# Altium PCB model_satellite.PcbDoc
Units mm, origin at the board's own origin, x right, y up, seen from the top; angles counter-clockwise.
Board outline 45 x 44 mm, 2 copper layers (Top Layer, Bottom Layer); 38 components, 25 nets, 182 pads, 51 vias.
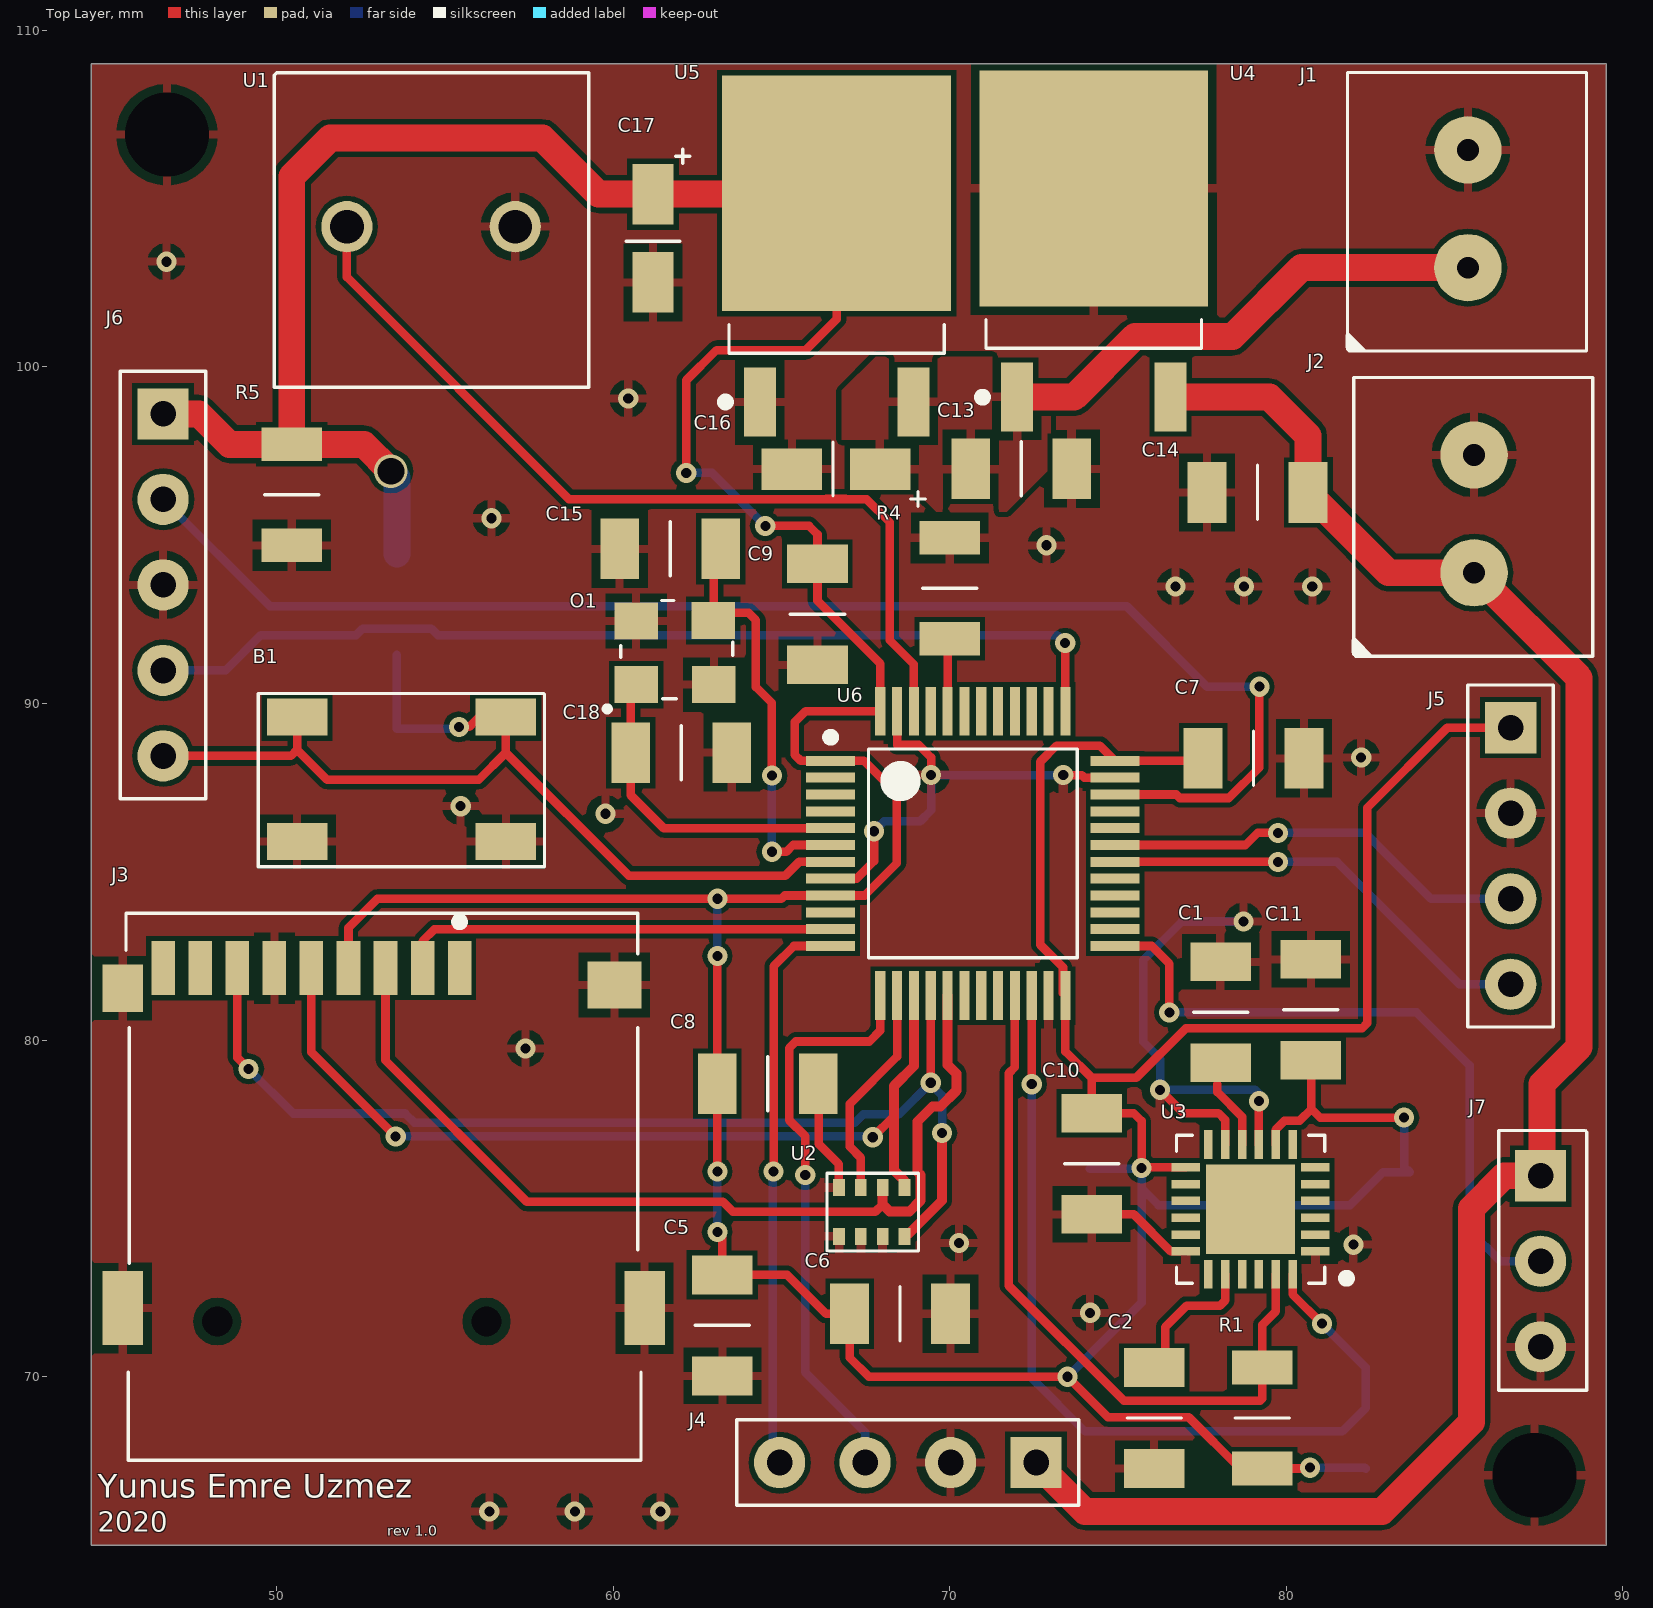
[diagram p0: Top Layer view]
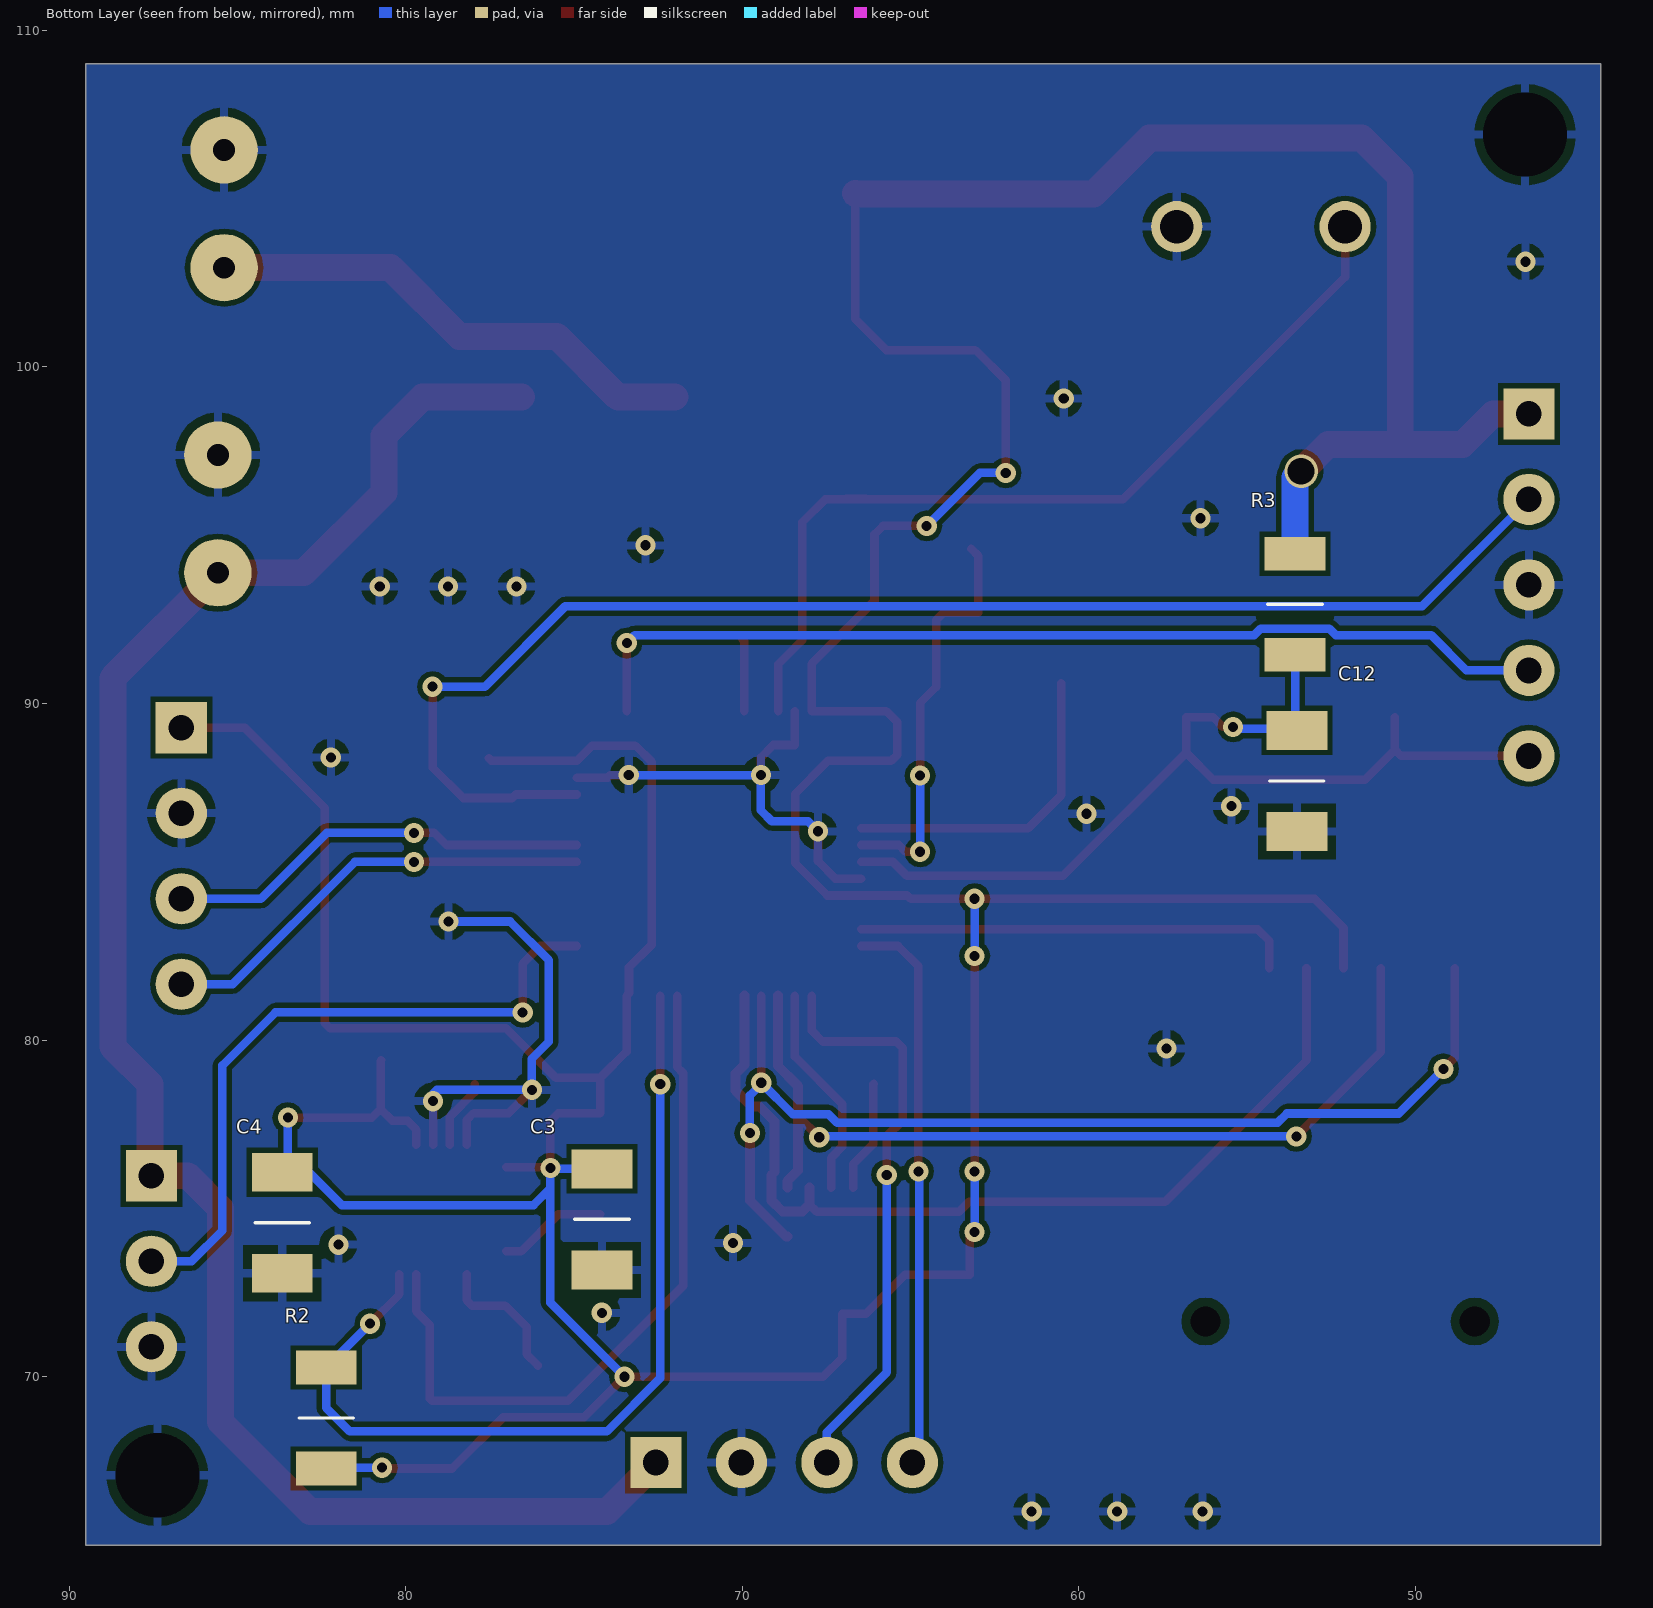
[diagram p1: Bottom Layer view, seen from below]
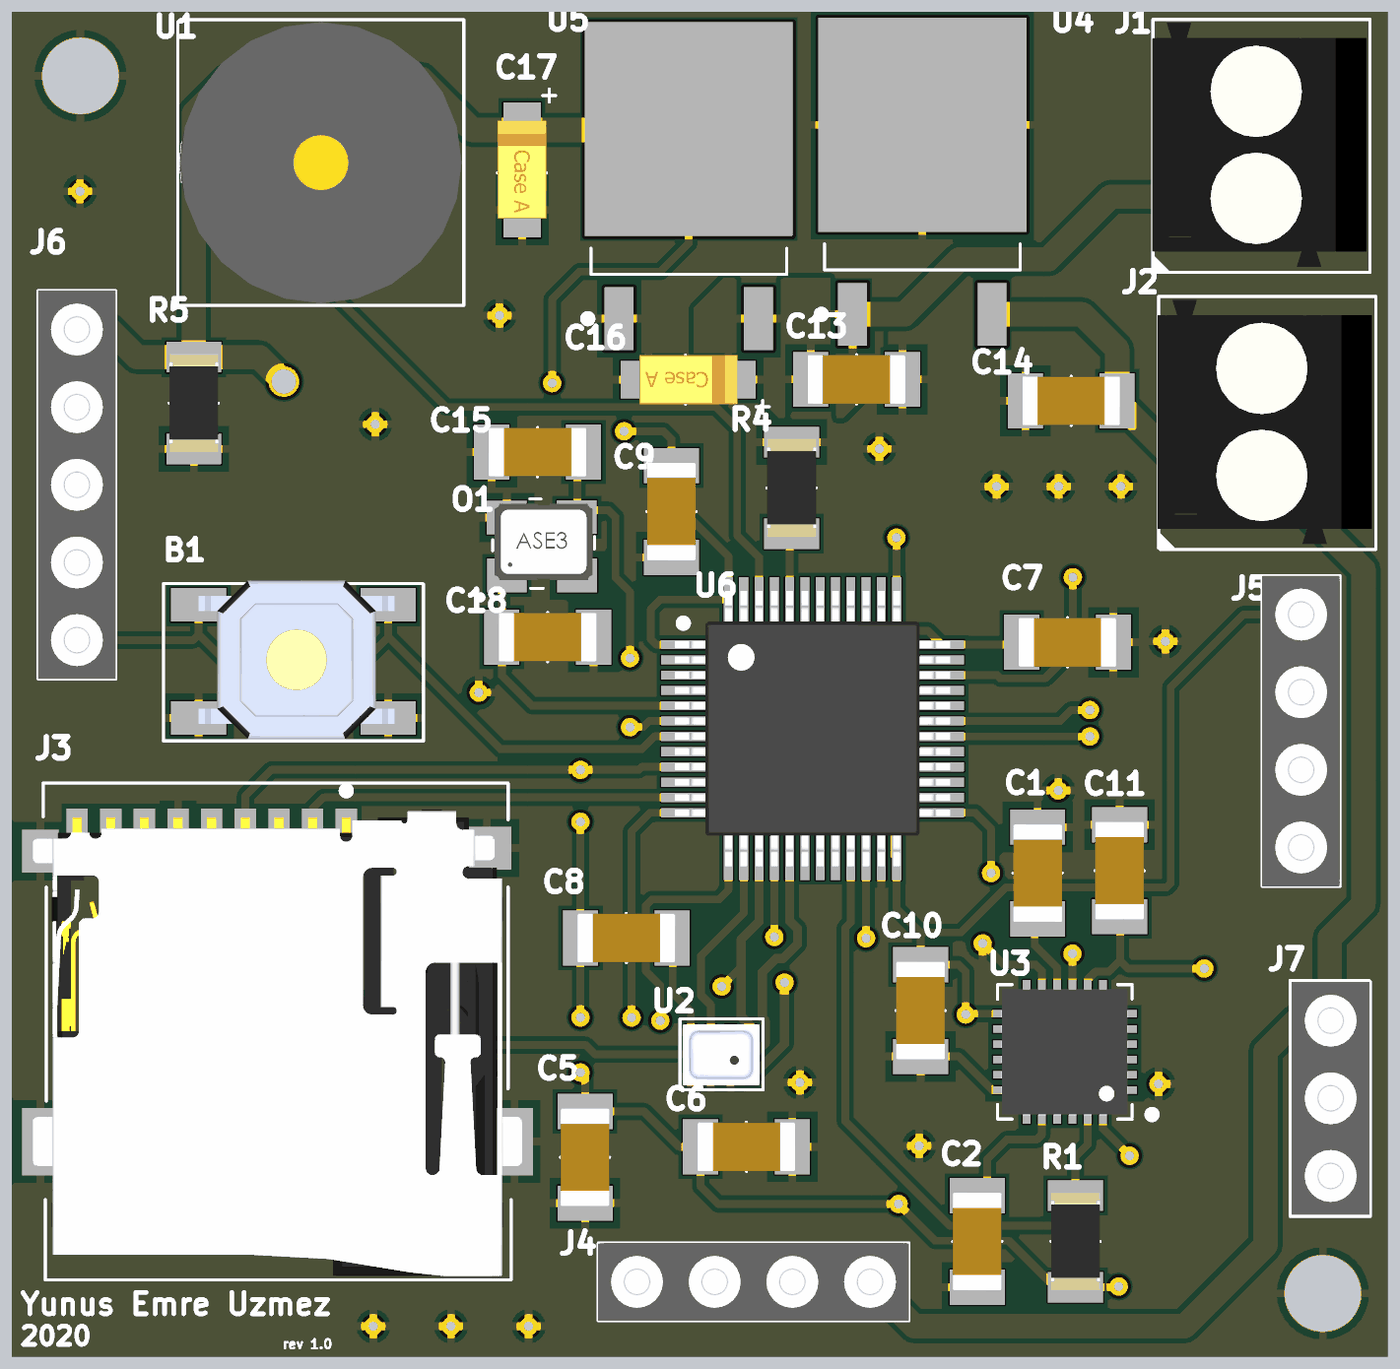
[diagram p2: 3D render of the assembled board from above, using the file's embedded part models]
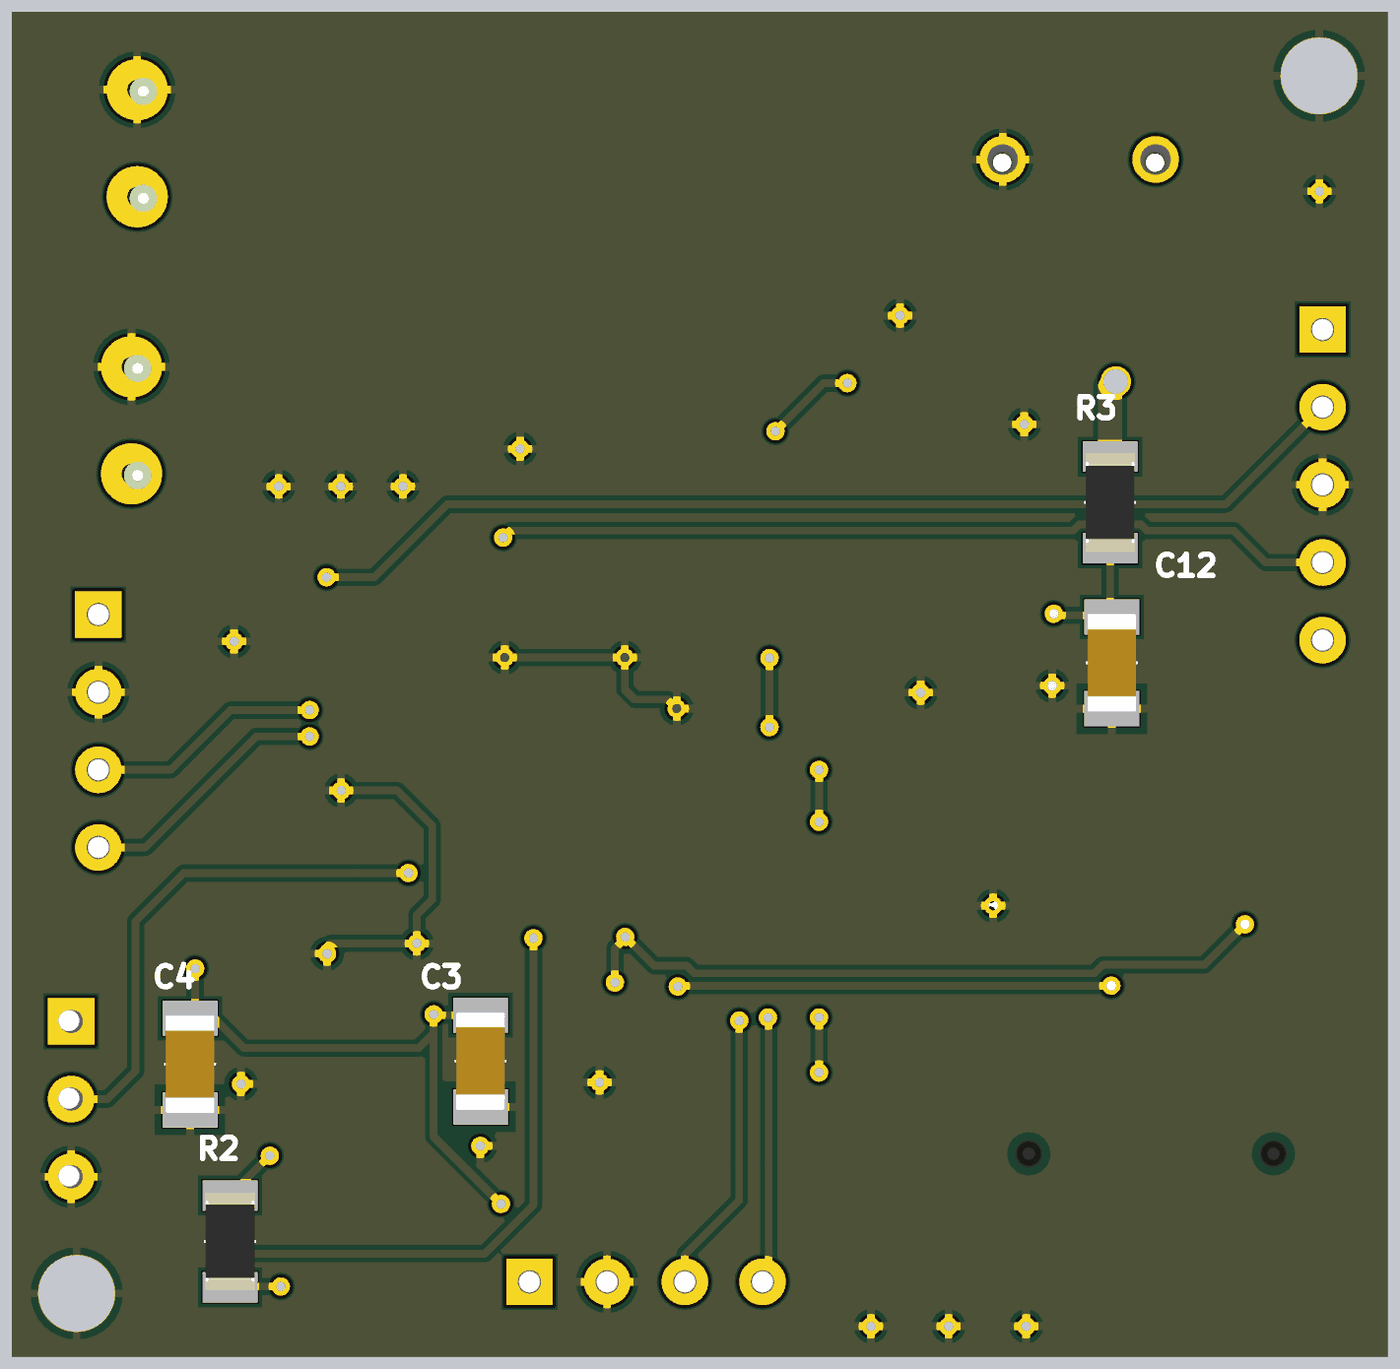
[diagram p3: 3D render of the assembled board from below, using the file's embedded part models]

## Layer stack, top to bottom
Top Solder: solder mask 0.0102, Solder Resist, Dk 3.5
Top Layer: signal copper 0.0356
Dielectric 1: dielectric 0.32, FR-4, Dk 4.8
Bottom Layer: signal copper 0.0356
Bottom Solder: solder mask 0.0102, Solder Resist, Dk 3.5

## Board outline
44.5,65 44.5,109 89.5,109 89.5,65

## Design rules (kind name [scope] priority, off if disabled: settings)
Clearance [All] p1: gap=0.254 ignorepadtopadclearanceinfootprint=FALSE except(0.152: Arc-Track Arc-SMDPad Arc-Poly Track-Track Track-SMDPad Track-Poly SMDPad-SMDPad SMDPad-THPad SMDPad-Poly THPad-Poly Via-Poly Fill-Poly Poly-Poly)
HoleSize [All] p1: absolutevalues=TRUE maxlimit=6 minlimit=0.025 maxpercent=80.000 minpercent=20.000
MinimumSolderMaskSliver [All] p1: minsoldermaskwidth=0.01
PolygonConnect [All] p1: connectstyle=Relief reliefconductorwidth=0.254 reliefentries=4 polygonreliefangle="90 Angle" airgapwidth=0.254
RoutingVias [All] p1: holewidth=0.3 width=0.6 viastyle="Through Hole" minholewidth=0.2 minwidth=0.2 maxholewidth=0.9 maxwidth=1.2
SilkToSilkClearance [All] p1: silktosilkclearance=0.1
SilkToSolderMaskClearance [IsPad] p1: minsilkscreentomaskgap=0.01 clearancetoexposedcopper=TRUE
SolderMaskExpansion [All] p1: expansion=0.102
Width [All] p1: maxlimit=1 minlimit=0.254 preferedwidth=0.3 minimp=50.000000 maximp=50.000000 favimp=50.000000
26 further rules are at their usual default settings.

## Components (designator, comment, footprint, x,y, rotation, side; value= is the part's Value field where it differs from the comment)
B1 "SMD PUSH BUTTON" "SMD PUSH BUTTON" 53.467,87.63 r180 top
C1 "0.1uF C1206" C1206 76.878,80.952 r90 top
C2 "2.2nF C1206" C1206 77.245,68.648 r270 top
C3 "0.1uF C1206" C1206 75.34,74.802 r90 bottom
C4 "0.1uF C1206" C1206 84.84,74.703 r90 bottom
C5 "0.1uF C1206" C1206 62.078,71.653 r90 top
C6 "0.1uF C1206" C1206 68.4,70.7 r180 top
C7 "0.1uF C1206" C1206 78.9,87.2 r180 top
C8 "0.1uF C1206" C1206 64.473,77.528 r180 top
C9 "0.1uF C1206" C1206 64.903,92.777 r90 top
C10 "0.1uF C1206" C1206 73.047,76.453 r90 top
C11 "0.1uF C1206" C1206 81.9,80.775 r270 top
C12 "0.1uF C1206" C1206 54.697,87.827 r90 bottom
C13 "330 nF C1206" C1206 72,95.8 r180 top
C14 "0.1uF C1206" C1206 79.019,95.098 r180 top
C15 "16pF C1206" C1206 61.57,93.421 r180 top
C16 "C1206 TANTAL" C1206-TANTAL 66.7,96.9 r180 top
C17 "C1206 TANTAL" C1206-TANTAL 61.253,103.897 r270 top
C18 "16pF C1206" C1206 62.154,89.713 r0 top
J1 "KLEMENS 1x2 3.5mm" "Klemens 1X2 3.5mm" 85.202,104.301 r90 top
J2 "KLEMENS 1x2 3.5mm" "Klemens 1X2 3.5mm" 85.387,95.239 r90 top
J3 "MICRO SD CARD HOLDER" MICRO_SDCARD 51.9,75.025 r0 top
J4 "HEADER 1X4" "Header 2.54 1x4" 68.25,67.199 r180 top
J5 "HEADER 1X4" "Header 2.54 1x4" 86.919,84.963 r270 top
J6 "HEADER 1X5" "Header 2.54 1x5" 47.904,92.253 r270 top
J7 "HEADER 1x3" "Header 2.54 1x3" 87.554,75.971 r270 top
O1 "8mHz 12.5pF Oscillator" "8MHZ OSCILLATOR" 61.607,91.874 r0 top
R1 "4.7K R1206" R1206 79.375,68.656 r270 top
R2 "4.7K R1206" R1206 82.271,68.656 r270 bottom
R3 "10K R1206" R1206 53.67,93.066 r90 bottom
R4 "10K R1206" R1206 70.09,93.304 r270 top
R5 "10K R1206" R1206 50.368,96.317 r90 top
U1 "BUZZER" BUZZER 55.753,104.572 r0 top
U2 "BMP280" BMP280 64.882,74.45 r90 top
U3 "MPU6050" QFN50P400X400X95_HS-25N 78.938,74.975 r180 top
U4 "L7805-DPAK" L7805 74.28,103.45 r90 top
U5 "LD108633-DPAK" L7805 66.644,103.308 r90 top
U6 "STM32F103C8T6" LQFP48-STM32F103CB6T 70.688,85.547 r0 top

## Footprints (in the part's own frame and the unit in brackets; to place one, negate y for a bottom-side part, rotate by r counter-clockwise, add the part's x,y. Pads: shape width x height; smd on the part's side, far side on the other; paste and mask are expansions set on the pad)
"8MHZ OSCILLATOR" [mm]
  rect 1.3x1.1 smd mask+0.05: 1(-0.913,-1.314) 2(1.387,-1.314) 3(1.371,0.593) 4(-0.918,0.577)
  silkscreen extent -1.82,-2.07 1.95,1.19, body extent -1.31,-1.46 1.89,1.04, height 1.22
BMP280 [mm]
  rect 0.5x0.35 smd mask+0.05: 1(1.168,-1.829) 2(1.168,-2.479) 3(1.168,-3.129) 4(1.168,-3.779) 5(-0.282,-3.779) 6(-0.282,-3.129) 7(-0.282,-2.479) 8(-0.282,-1.829)
  silkscreen extent -0.71,-4.19 1.6,-1.47, body extent -0.57,-4.07 1.43,-1.57, height 0.95
BUZZER [mil]
  round 60 hole 39.37: 1(-144,-16) 2(52.85,-16)
  silkscreen extent -229,-204 139,164, body extent -227,-201 136,161, height 217
C1206 [mm]
  rect 1.15x1.8 smd mask+0.05: 1(-1.627,-1.172) 2(1.373,-1.172)
  silkscreen extent -0.13,-1.98 -0.13,-0.37, body extent -1.73,-1.97 1.47,-0.37, height 1
C1206-TANTAL [mm]
  rect 1.8x1.23 smd mask+0.05: 1(-1.234,-0.064) 1(-1.234,-0.064) 2(1.386,-0.064)
  silkscreen extent -2.57,-0.86 0.17,1.04, body extent -1.53,-0.86 1.67,0.74, height 1.62
"Header 2.54 1x3" [mil]
  rect 60x60 hole 30: 1(0,0)
  round 60 hole 30: 2(100,0) 3(200,0)
  silkscreen extent -53,-49 251,54, body extent -51,-47 249,53, height 237
"Header 2.54 1x4" [mil]
  rect 60x60 hole 30: 1(-170,-10)
  round 60 hole 30: 2(-70,-10) 3(30,-10) 4(130,-10)
  silkscreen extent -220,-60 180,40, body extent -220,-60 180,40, height 245
"Header 2.54 1x5" [mil]
  rect 60x60 hole 30: 1(-250,-50)
  round 60 hole 30: 2(-150,-50) 3(-50,-50) 4(50,-50) 5(150,-50)
  silkscreen extent -300,-100 200,0, body extent -300,-100 200,0, height 245
"Klemens 1X2 3.5mm" [mm]
  round 2 hole 0.65: 1(-1.355,-0.192) 2(2.145,-0.192)
  silkscreen extent -3.86,-3.72 4.44,3.44, body extent -3.66,-3.59 4.34,3.41, height 8.9
L7805 [mm] "D-PAK, 3-Pads, Body 6,40x6,56mm (max), IPC Medium Density"
  rect 2.05x0.95 smd: 1(-4.35,2.28) 2(-4.35,-2.28)
  rect 7x6.8 smd: 3(1.85,0)
  silkscreen extent -4.47,-3.2 -2.05,3.43, body extent -2.9,-3.2 3.7,3.2, height 2.3
LQFP48-STM32F103CB6T [mm] "TSQFP, 48-Leads, Body 7,00x7,00mm, Pitch 0,50mm, IPC Medium Density"
  rect 1.45x0.3 smd mask+0.05: 1(-4.225,2.75) 2(-4.225,2.25) 3(-4.225,1.75) 4(-4.225,1.25) 5(-4.225,0.75) 6(-4.225,0.25) 7(-4.225,-0.25) 8(-4.225,-0.75) 9(-4.225,-1.25) 10(-4.225,-1.75) 11(-4.225,-2.25) 12(-4.225,-2.75) 25(4.225,-2.75) 26(4.225,-2.25) 27(4.225,-1.75) 28(4.225,-1.25) 29(4.225,-0.75) 30(4.225,-0.25) 31(4.225,0.25) 32(4.225,0.75) 33(4.225,1.25) 34(4.225,1.75) 35(4.225,2.25) 36(4.225,2.75)
  rect 0.3x1.45 smd mask+0.05: 13(-2.75,-4.225) 14(-2.25,-4.225) 15(-1.75,-4.225) 16(-1.25,-4.225) 17(-0.75,-4.225) 18(-0.25,-4.225) 19(0.25,-4.225) 20(0.75,-4.225) 21(1.25,-4.225) 22(1.75,-4.225) 23(2.25,-4.225) 24(2.75,-4.225) 37(2.75,4.225) 38(2.25,4.225) 39(1.75,4.225) 40(1.25,4.225) 41(0.75,4.225) 42(0.25,4.225) 43(-0.25,4.225) 44(-0.75,4.225) 45(-1.25,4.225) 46(-1.75,4.225) 47(-2.25,4.225) 48(-2.75,4.225)
  silkscreen extent -4.35,-3.1 3.1,3.57, body extent -4.5,-4.5 4.5,4.5, height 1.6
MICRO_SDCARD [mm]
  rect 0.7x1.6 smd paste+0 mask+0: 1(3.542,7.115) 2(2.442,7.115) 3(1.342,7.115) 4(0.242,7.115) 5(-0.858,7.115) 6(-1.958,7.115) 7(-3.058,7.115) 8(-4.158,7.115) Cd(-5.258,7.115)
  rect 1.2x1.4 smd paste+0 mask+0: 10(-6.458,6.515)
  rect 1.6x1.4 smd paste+0 mask+0: 11(8.142,6.615)
  rect 1.2x2.2 smd paste+0 mask+0: 12(-6.458,-2.985) 13(9.042,-2.985)
  round 0 hole 0.9 unplated paste-1000 mask+0: ""(-3.658,-3.385) ""(4.342,-3.385)
  silkscreen extent -6.37,-7.51 8.93,8.74, body extent -6.71,-7.38 9.29,7.87, height 1.85
QFN50P400X400X95_HS-25N [mm] "QFN, 24-Leads, Body 4,00x4,00mm, Pitch 0,50mm, Thermal Pad 2,65x2,65mm, IPC Medium Density"
  rect 0.85x0.25 smd mask+0.05: 1(-1.925,1.25) 2(-1.925,0.75) 3(-1.925,0.25) 4(-1.925,-0.25) 5(-1.925,-0.75) 6(-1.925,-1.25) 13(1.925,-1.25) 14(1.925,-0.75) 15(1.925,-0.25) 16(1.925,0.25) 17(1.925,0.75) 18(1.925,1.25)
  rect 0.25x0.85 smd mask+0.05: 7(-1.25,-1.925) 8(-0.75,-1.925) 9(-0.25,-1.925) 10(0.25,-1.925) 11(0.75,-1.925) 12(1.25,-1.925) 19(1.25,1.925) 20(0.75,1.925) 21(0.25,1.925) 22(-0.25,1.925) 23(-0.75,1.925) 24(-1.25,1.925)
  rect 2.65x2.65 smd: 25(0,0)
  silkscreen extent -2.98,-2.2 2.2,2.2, body extent -2.07,-2.07 2.07,2.07, height 0.95
R1206 [mm]
  rect 1x1.8 smd mask+0.05: 1(-1.619,-0.088) 2(1.381,-0.088)
  silkscreen extent -0.12,-0.89 -0.12,0.72, body extent -1.72,-0.89 1.48,0.72, height 0.55
"SMD PUSH BUTTON" [mm]
  rect 1.8x1.1 smd mask+0.05: 1(-3.348,1.734) 2(2.852,1.734) 3(-3.348,-1.966) 4(2.852,-1.966)
  silkscreen extent -4.5,-2.67 4,2.48, body extent -3.55,-2.77 2.85,2.43, height 1.5

## Part data
J1 J2: "1x2 3.5mm Klemens"
J3: "Micro SD Card Holder"
J4 J5: "2.54mm 1x4 Header"
J6: "2.54mm 1x5 Header"
J7: "1x3 2.54mm Header"
U1: "Buzzer 5V 5mm"
U2: "BMP280 DIGITAL PRESSURE SENSOR"
U3: "MPU6050 GYRO SENSOR"
U4: "L7805 5V REGULATOR"
U5: "LD108633 3.3V REGULATOR"
U6: "STM32F103C876 MICROCONTROLLER"
B1: Satýn Alma Linki=https://urun.n11.com/diger/mini-pushbutton-switch-smd-P227461537?gclid=Cj0KCQjwkoDmBRCcARIsAG3xzl8Y_-jeD7HocNM6lvuZ_rVp83568XPGtNzlPwXWLph8oCRqo0yh87UaApZYEALw_wcB&gclsrc=aw.ds

## Free pads (board coordinates)
  rect 0x0 hole 2.5: 9(46.75,106.9) 9(87.375,67.075)

## Via types
v1: diameter 0.6, hole 0.3, Top Layer to Bottom Layer, 50 vias
v2: diameter 1, hole 0.8, Top Layer to Bottom Layer, 1 vias

## Nets (pads, with @x,y where several pads share a name; then routed paths per layer and width w, separated by ;. In a path a pad name is that pad's centre, name@x,y a point inside that pad or via, vN(x,y) a via of type N, cw(c..) or ccw(c..) an arc to the next point about the centre after c; other vN are vias at no path point)
+3.3V: C3.2 C4.2 C5.2 C6.2 C7.2 C8.2 C9.2 C10.2 C11.2 C17.1 J3.4 J5.1 J6.1 R1.2 R2.2 R3.2 R5.2 U3.8 U3.13 U5.3 U6.1 U6.9 U6.24 U6.36 U6.48 | length 185.1
  Top Layer w0.254: J3.4 52.142,83.342 53,84.2 v1(63.1,84.2) 65,84.2 65.097,84.297 U6.9 67.472,84.297 68.434,85.259 68.434,87.316 67.453,88.297 U6.1 65.575,88.297 65.4,88.472 65.4,89.45 65.722,89.772 U6.48 67.938,91.187 66.075,93.05 C9.2 66.075,95.025 65.825,95.275 v1(64.525,95.275) ; v1(62.175,96.85) 62.175,99.6 63.075,100.5 65.725,100.5 66.644,101.419 U5.3 ; v1(63.1,74.3) 63.25,74.15 C5.2 65.174,73.026 66.328,71.872 C6.2 67.027,70.573 67.6,70 v1(73.5,70) 74.7,68.8 77.1,68.8 78.625,67.275 R1.2 80.675,67.275 v1(80.7,67.3) ; v1(63.1,76.1) v1@63.1,76.2 ; v1(63.1,82.5) C8.2 v1@63.1,76.2 ; v1@63.2,76.1 v1@63.1,76.2 ; U3.13 75.725,76.225 v1(75.7,76.2) 75.7,77.6 75.474,77.826 C10.2 74.219,78.881 ; C7.2 77.452,88.297 U6.36 74.46,88.75 73.175,88.75 72.694,88.269 72.694,82.836 73.367,82.163 73.367,81.393 U6.24 73.438,79.662 74.219,78.881 ; U3.8 79.688,77.345 79.947,77.604 80.392,77.604 80.747,77.959 ; C11.2 80.747,79.383 80.747,77.959 ; v1(83.5,77.7) 81.006,77.7 80.747,77.959 ; J5.1 84.781,89.281 82.4,86.9 82.4,80.5 82.25,80.35 77.013,80.35 75.544,78.881 74.219,78.881
  Top Layer w0.8: J6.1 47.701,98.603 48.606,97.698 R5.2 ; v2(53.4,96.9) 52.602,97.698 R5.2 ; U5.3 66.616,105.131 61.189,105.131 59.569,105.131 57.9,106.8 51.6,106.8 50.456,105.656 R5.2
  Bottom Layer w0.254: v1(62.175,96.85) 62.95,96.85 v1(64.525,95.275) ; v1(63.1,74.3) v1(63.1,76.1) ; v1(63.1,82.5) v1(63.1,84.2) ; v1@63.2,76.1 v1@63.25,76.05 ; v1(73.5,70) 75.7,72.2 75.7,75.6 ; C3.2 75.675,76.175 v1(75.7,76.2) 75.7,75.6 ; v1(80.7,67.3) 82.334,67.3 R2.2 ; v1(83.5,77.7) 83.5,76.243 C4.2 82.876,76.076 81.9,75.1 76.2,75.1 75.7,75.6
  Bottom Layer w0.8: v2(53.4,96.9) 53.582,96.718 R3.2
+5V: C14.1 J2.1 J4.1 J7.1 U4.2 | length 55.3
  Top Layer w0.8: J4.1 74.021,66 82.842,66 85.5,68.658 85.5,75 86.471,75.971 J7.1 87.6,76.018 87.6,78.7 88.7,79.8 88.7,90.763 J2.1 83.032,93.884 C14.1 80.646,97.954 79.5,99.1 U4.2
+7.4V: C13.2 C16.1 J1.1 U4.1 U5.2 | length 15
  Top Layer w0.8: U4.1 73.7,99.1 75.5,100.9 78.4,100.9 80.446,102.946 J1.1
GND: B1.1 B1.2 C1.2 C2.2 C3.1 C4.1 C5.1 C6.1 C7.1 C8.1 C9.1 C10.1 C11.1 C12.1 C13.1 C14.2 C15.2 C16.2 C17.2 C18.2 J1.2 J2.2 J3.6 J3.10 J3.11 J3.12 J3.13 J4.2 J5.2 J6.3 J7.3 O1.2 O1.4 pad.9 R4.1 R5.1 U1.2 U2.1 U2.6 U2.7 U2.8 U3.1 U3.9 U3.11 U3.18 U4.3 U5.1 U6.8 U6.23 U6.35 U6.47 | length 35.2
  Top Layer w0.254: C8.1 66.116,78.684 66.116,76.909 66.711,76.314 U2.1 ; U6.8 67.233,84.797 67.753,85.318 v1(67.753,86.204) ; U6.47 68.438,88.768 69.082,88.768 69.45,88.4 v1(69.45,87.875) ; v1(73.375,87.875) 73.925,87.875 74.003,87.797 U6.35 ; C10.1 75.468,74.826 76.568,73.725 U3.18 ; v1(76.25,78.525) 76.774,78.001 76.774,77.996 76.937,77.832 77.985,77.832 78.188,77.63 U3.11 ; U3.9 v1(79.188,78.188)
  Bottom Layer w0.254: v1@67.749,86.2 v1(67.753,86.204) 68.049,86.5 69.125,86.5 69.45,86.825 v1(69.45,87.875) v1(73.375,87.875) ; v1(78.725,83.525) 76.9,83.525 75.748,82.373 75.748,79.957 76.25,79.454 v1(76.25,78.525) 79.075,78.525 79.188,78.412 v1(79.188,78.188)
  other v1: 56.325,66 58.865,66 61.405,66 74.175,71.9 82,73.925 70.275,73.975 57.404,79.756 59.775,86.725 55.475,86.95 82.225,88.4 76.708,93.472 78.74,93.472 80.772,93.472 72.875,94.7 56.388,95.504 60.452,99.06 46.736,103.124
NetB1_3: B1.3 B1.4 C12.2 J6.5 R3.1 U6.7 | length 29.9
  Top Layer w0.254: J6.5 50.43,88.443 50.615,88.628 B1.4 ; 50.622,88.621 51.511,87.732 56.007,87.732 56.815,88.54 ; v1(55.423,89.306) 55.728,89.306 56.017,89.596 B1.3 56.815,88.54 ; U6.7 65.534,85.297 65.118,84.881 60.474,84.881 56.815,88.54
  Bottom Layer w0.254: R3.1 53.582,89.256 55.372,89.256 v1(55.423,89.306)
NetC1_1: C1.1 U3.10 | length 2.1
  Top Layer w0.254: 77.953,78.686 77.953,78.46 78.688,77.725 U3.10
NetC2_1: C2.1 U3.20 | length 4.2
  Top Layer w0.254: C2.1@76.073,70.335 76.403,70.666 76.403,71.476 77.038,72.111 78.029,72.111 78.188,72.27 U3.20
NetC15_1: C15.1 O1.3 U6.6 | length 12.2
  Top Layer w0.254: C15.1 62.992,94.388 62.992,92.694 64.024,92.694 64.246,92.472 64.246,90.491 64.719,90.018 v1(64.719,87.859) ; v1(64.719,85.598) 65.151,85.598 65.35,85.797 U6.6
  Bottom Layer w0.254: v1(64.719,85.598) v1(64.719,87.859)
NetC18_1: C18.1 O1.1 U6.5 | length 9.7
  Top Layer w0.254: O1.1@60.527,90.606 C18.1 60.528,88.539 60.528,87.274 61.505,86.297 U6.5
NetJ3_2: J3.2 U6.11 | length 13.1
  Top Layer w0.254: J3.2 54.342,82.942 54.697,83.297 U6.11
NetJ3_3: J3.3 U2.3 U6.17 | length 28.2
  Top Layer w0.254: J3.3 53.242,79.397 57.439,75.2 63.264,75.2 63.564,74.9 67.793,74.9 68.011,75.118
  Top Layer w0.3: U2.3 68.011,75.118 68.219,74.91 68.804,74.91 69.138,75.243 69.138,75.993 69.044,76.086 69.044,77.584 69.491,78.031 69.73,78.031 70.198,78.499 70.198,79.006 69.938,79.266 U6.17
NetJ3_5: J3.5 U2.4 U6.15 | length 27.2
  Top Layer w0.254: J3.5 51.042,79.641 v1(53.543,77.14) ; v1(67.716,77.114) 68.351,77.749
  Top Layer w0.3: U2.4 68.661,75.82 68.351,76.129 68.351,77.749 68.351,78.643 68.938,79.23 U6.15
  Bottom Layer w0.254: v1(53.543,77.14) 67.691,77.14 v1(67.716,77.114)
NetJ3_7: J3.7 U2.5 U6.16 | length 32.3
  Top Layer w0.254: J3.7 48.842,79.479 v1(49.174,79.146) ; v1(69.438,78.735) U6.16
  Top Layer w0.3: U2.5 68.702,74.168 69.774,75.24 v1(69.774,77.241)
  Bottom Layer w0.254: v1(49.174,79.146) 50.5,77.821 53.825,77.821 54.1,77.546 67.185,77.546 67.434,77.795 68.499,77.795 v1(69.438,78.735) 69.438,78.695 69.774,78.359 v1(69.774,77.241)
NetJ4_3: J4.3 U6.13 | length 17.2
  Top Layer w0.254: v1(65.71,75.997) 65.71,77.15 65.237,77.623 65.237,79.766 65.43,79.959 67.615,79.959 67.938,80.283 U6.13
  Bottom Layer w0.254: v1(65.71,75.997) 65.71,70.129 67.488,68.351 J4.3
NetJ4_4: J4.4 U6.12 | length 16.8
  Top Layer w0.254: v1(64.77,76.098) 64.77,82.194 65.373,82.797 U6.12
  Bottom Layer w0.254: v1(64.77,76.098) 64.745,76.073 64.745,67.656 J4.4
NetJ5_3: J5.3 U6.31 | length 12.7
  Top Layer w0.254: U6.31 78.787,85.797 79.146,86.157 v1(79.756,86.157)
  Bottom Layer w0.254: v1(79.756,86.157) 82.347,86.157 84.303,84.201 J5.3
NetJ5_4: J5.4 U6.30 | length 13.3
  Top Layer w0.254: U6.30 74.917,85.293 v1(79.756,85.293)
  Bottom Layer w0.254: v1(79.756,85.293) 81.509,85.293 85.141,81.661 J5.4
NetJ6_2: J6.2 U6.34 | length 42
  Top Layer w0.254: U6.34 76.732,87.297 76.836,87.193 78.293,87.193 79.2,88.1 v1(79.2,90.5)
  Bottom Layer w0.254: J6.2 49.809,92.888 75.26,92.888 77.648,90.5 v1(79.2,90.5)
NetJ6_4: J6.4 U6.37 | length 29.5
  Top Layer w0.254: v1(73.431,91.796) 73.438,91.789 U6.37
  Bottom Layer w0.254: J6.4 48.489,90.983 49.531,92.025 52.366,92.025 52.567,92.226 54.598,92.226 54.798,92.025 73.202,92.025 v1(73.431,91.796)
NetJ7_2: J7.2 U6.25 | length 20.2
  Top Layer w0.254: U6.25 76.004,82.797 76.525,82.276 v1(76.525,80.825)
  Bottom Layer w0.254: v1(76.525,80.825) 83.869,80.825 85.446,79.248 85.446,74.346 86.36,73.431 J7.2
NetR1_1: R1.1 U3.23 U6.21 | length 21.5
  Top Layer w0.254: U6.21 71.938,79.2 71.757,79.019 71.757,72.706 75.172,69.291 79.223,69.291 79.287,69.356 R1.1 79.287,71.54 79.688,71.941 U3.23
NetR2_1: R2.1 U3.24 U6.22 | length 27.1
  Top Layer w0.254: v1(72.438,78.692) U6.22 ; U3.24 80.188,72.446 v1(81.057,71.577)
  Bottom Layer w0.254: v1(72.438,78.692) 72.438,69.962 74.023,68.377 81.661,68.377 82.359,69.074 R2.1 v1(81.057,71.577)
NetR4_2: R4.2 U6.44 | length 2.2
  Top Layer w0.254: U6.44 69.938,91.858 R4.2
NetU1_1: U1.1 U6.46 | length 26.6
  Top Layer w0.254: U1.1 52.095,102.667 58.692,96.07 66.33,96.07 66.335,96.075 66.913,96.075 66.918,96.07 67.531,96.07 68.224,95.377 68.224,91.875 68.938,91.161 U6.46
NetU2_2: U2.2 U6.14 | length 6.4
  Top Layer w0.254: U2.2 67.361,76.507 67.035,76.832 67.035,78.11 68.438,79.513 U6.14
pads on no net: J3. J3.1 J3.8 J3.Cd U3.2 U3.3 U3.4 U3.5 U3.6 U3.7 U3.12 U3.14 U3.15 U3.16 U3.17 U3.19 U3.21 U3.22 U3.25 U6.2 U6.3 U6.4 U6.10 U6.18 U6.19 U6.20 U6.26 U6.27 U6.28 U6.29 U6.32 U6.33 U6.38 U6.39 U6.40 U6.41 U6.42 U6.43 U6.45

## Polygon pours and split planes (outlines as drawn)
GND on Top Layer "GND_L01_P022" (solid, pour order 22): 44.5,109 89.5,109 89.5,65 44.5,65
+7.4V on Top Layer "+7.4V_L01_P016" (solid, remove dead copper, pour order 16): 66.8,96.3 67,96.1 69.2,96.1 69.6,95.7 71.7,95.7 73,97 73,100.2 72.8,100.4 72.7,100.3 67.8,100.3 66.8,99.3
no net on Top Layer "Top Layer-No Net" (solid, pour order 6): 61.6,98.9
no net on Top Layer "Top Layer-No Net 1" (solid, pour order 4): 72.39,100.33
no net on Top Layer "Top Layer-No Net 2" (solid, pour order 2): 72.39,99.06
GND on Bottom Layer "GND_L02_P024" (solid, pour order 24): 44.5,109 89.5,109 89.5,65 44.5,65

## Silkscreen, mask and mechanical layers (free items; w line width, h text height)
Top Overlay:
  text "Yunus Emre Uzmez" at 44.7,66.4 h0.7
  text "2020" at 44.7,65.4 h0.6
  text "rev 1.0" at 53.3,65.275 h0.3
Mechanical 1:
  lines w0.1: 44.5,65 44.5,109 89.5,109 ; 44.525,65 89.525,65 ; 89.461,64.924 89.461,108.924